# EAGLE board top_plate_mirrored_both_fixed_gap (EAGLE 9.6.2)

Size 109 x 96 mm. Coordinates in mm from the lower left corner, seen from the top.
Outline: 109,3.5 109,92.5 arc90 105.5,96 28.5,96 arc90 27,94.5 27,88.75 arc-90 26,87.75 18,87.75 arc-90 17,88.75 17,95 arc90 16,96 arc90 15,95 15,82.5 arc-90 13.5,81 1.5,81 arc90 0,79.5 0,72.75 arc90 1.5,71.25 13.5,71.25 arc-90 15,69.75 15,58.5 arc90 18.5,55 31,55 arc-90 33,53 33,3.5 arc90 36.5,0 105.5,0 arc90 109,3.5
Copper layers (1+2*15+16): Top 0.035559375mm / dielectric 0.47751875mm / pwr 0.035559375mm / dielectric 0.47751875mm / gnd 0.035559375mm / dielectric 0.47751875mm / Bottom 0.035559375mm
Design rules "SparkFun-4-Layer-General-JLCPCB *": minimum track width 6mil, minimum drill 12mil, track to track 6mil, track to pad 6mil, pad to pad 6mil, via to via 6mil, smd to smd 6mil, copper to edge 6mil, drill to drill 6mil, minimum pad ring 7mil, minimum via ring 7mil, stop-mask expansion 3mil, vias tented up to drill 25mil, thermal gap 10mil

## Footprints (pad centres in the part's own frame; a part is rotated, then mirrored left to right if it is on the bottom)
M2_SCREW_FOOT = hole 2.2: 0,0

## Placement (x,y rotation side)
U$1  SW_OPENM  [SW_OPENING]  99,10 0 bottom
U$2  SW_OPENM  [SW_OPENING]  80,10 0 bottom
U$3  SW_OPENM  [SW_OPENING]  61,10 0 bottom
U$4  SW_OPENM  [SW_OPENING]  42,10 0 bottom
U$5  SW_OPENM  [SW_OPENING]  99,29 0 bottom
U$6  SW_OPENM  [SW_OPENING]  80,29 0 bottom
U$7  SW_OPENM  [SW_OPENING]  61,29 0 bottom
U$8  M2_SCREW_DEV  [M2_SCREW_FOOT]  70.5,57.5 0 bottom
U$9  M2_SCREW_DEV  [M2_SCREW_FOOT]  51.5,76.5 0 bottom
U$10  SW_OPENM  [SW_OPENING]  42,29 0 bottom
U$11  SW_OPENM  [SW_OPENING]  99,48 0 bottom
U$12  M2_SCREW_DEV  [M2_SCREW_FOOT]  70.5,38.5 0 bottom
U$13  M2_SCREW_DEV  [M2_SCREW_FOOT]  51.5,19.5 0 bottom
U$14  M2_SCREW_DEV  [M2_SCREW_FOOT]  89.5,76.5 0 bottom
U$15  SW_OPENM  [SW_OPENING]  80,48 0 bottom
U$16  SW_OPENM  [SW_OPENING]  61,48 0 bottom
U$18  SW_OPENM  [SW_OPENING]  42,48 0 bottom
U$19  SW_OPENM  [SW_OPENING]  99,67 0 bottom
U$20  SW_OPENM  [SW_OPENING]  99,86 0 bottom
U$21  SW_OPENM  [SW_OPENING]  80,67 0 bottom
U$22  M2_SCREW_DEV  [M2_SCREW_FOOT]  89.5,19.5 0 bottom
U$23  SW_OPENM  [SW_OPENING]  61,67 0 bottom
U$24  SW_OPENM  [SW_OPENING]  42,67 0 bottom
U$25  SW_OPENM  [SW_OPENING]  80,86 0 bottom
U$26  SW_OPENM  [SW_OPENING]  61,86 0 bottom
U$27  SW_OPENM  [SW_OPENING]  42,86 0 bottom

## Library data of the parts
U$1-U$16 U$18-U$27 = duckypad

## Text on the board
bDocu: big round corner 3.5mm